# Altium PCB Tugas1.PcbDoc
Units mil, origin at the board's own origin, x right, y up, seen from the top; angles counter-clockwise.
Board outline 6000 x 4000 mil, 2 copper layers (Top Layer, Bottom Layer); 14 components, 13 nets, 57 pads, 0 vias.
Unrouted connection lines stored in the file: 1.
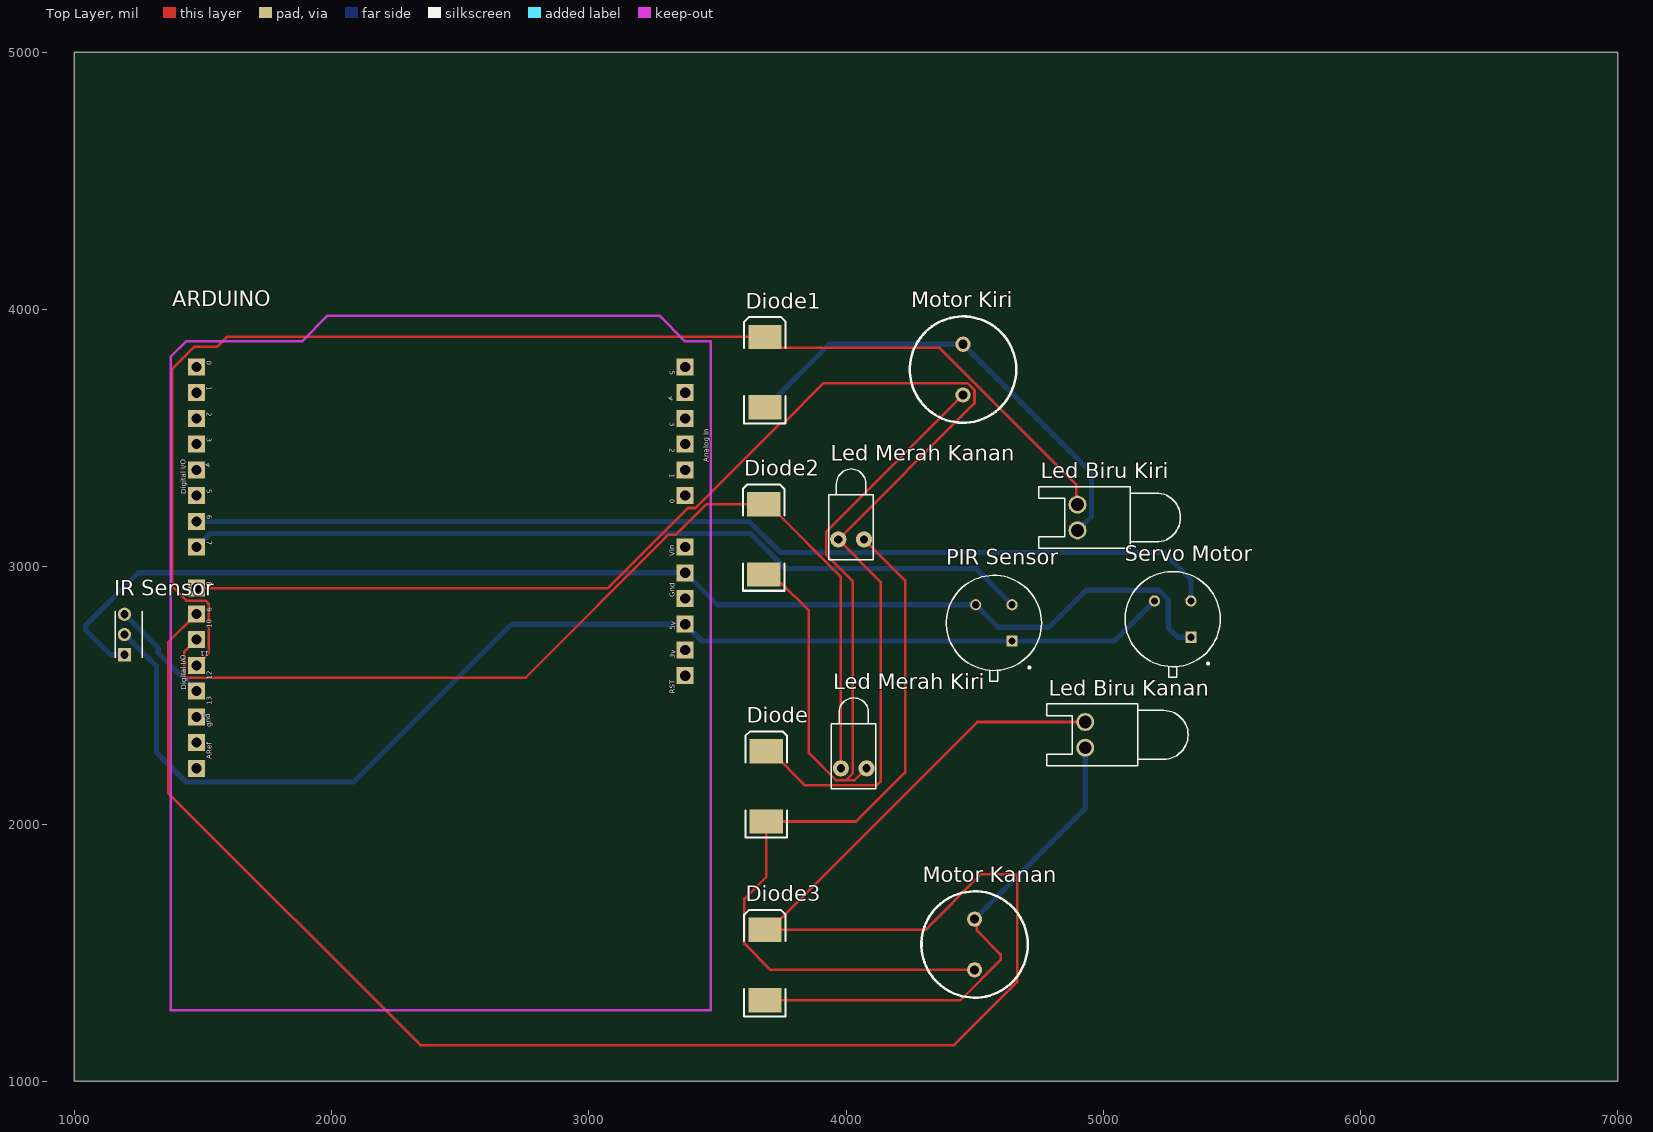
[diagram p0: Top Layer view]
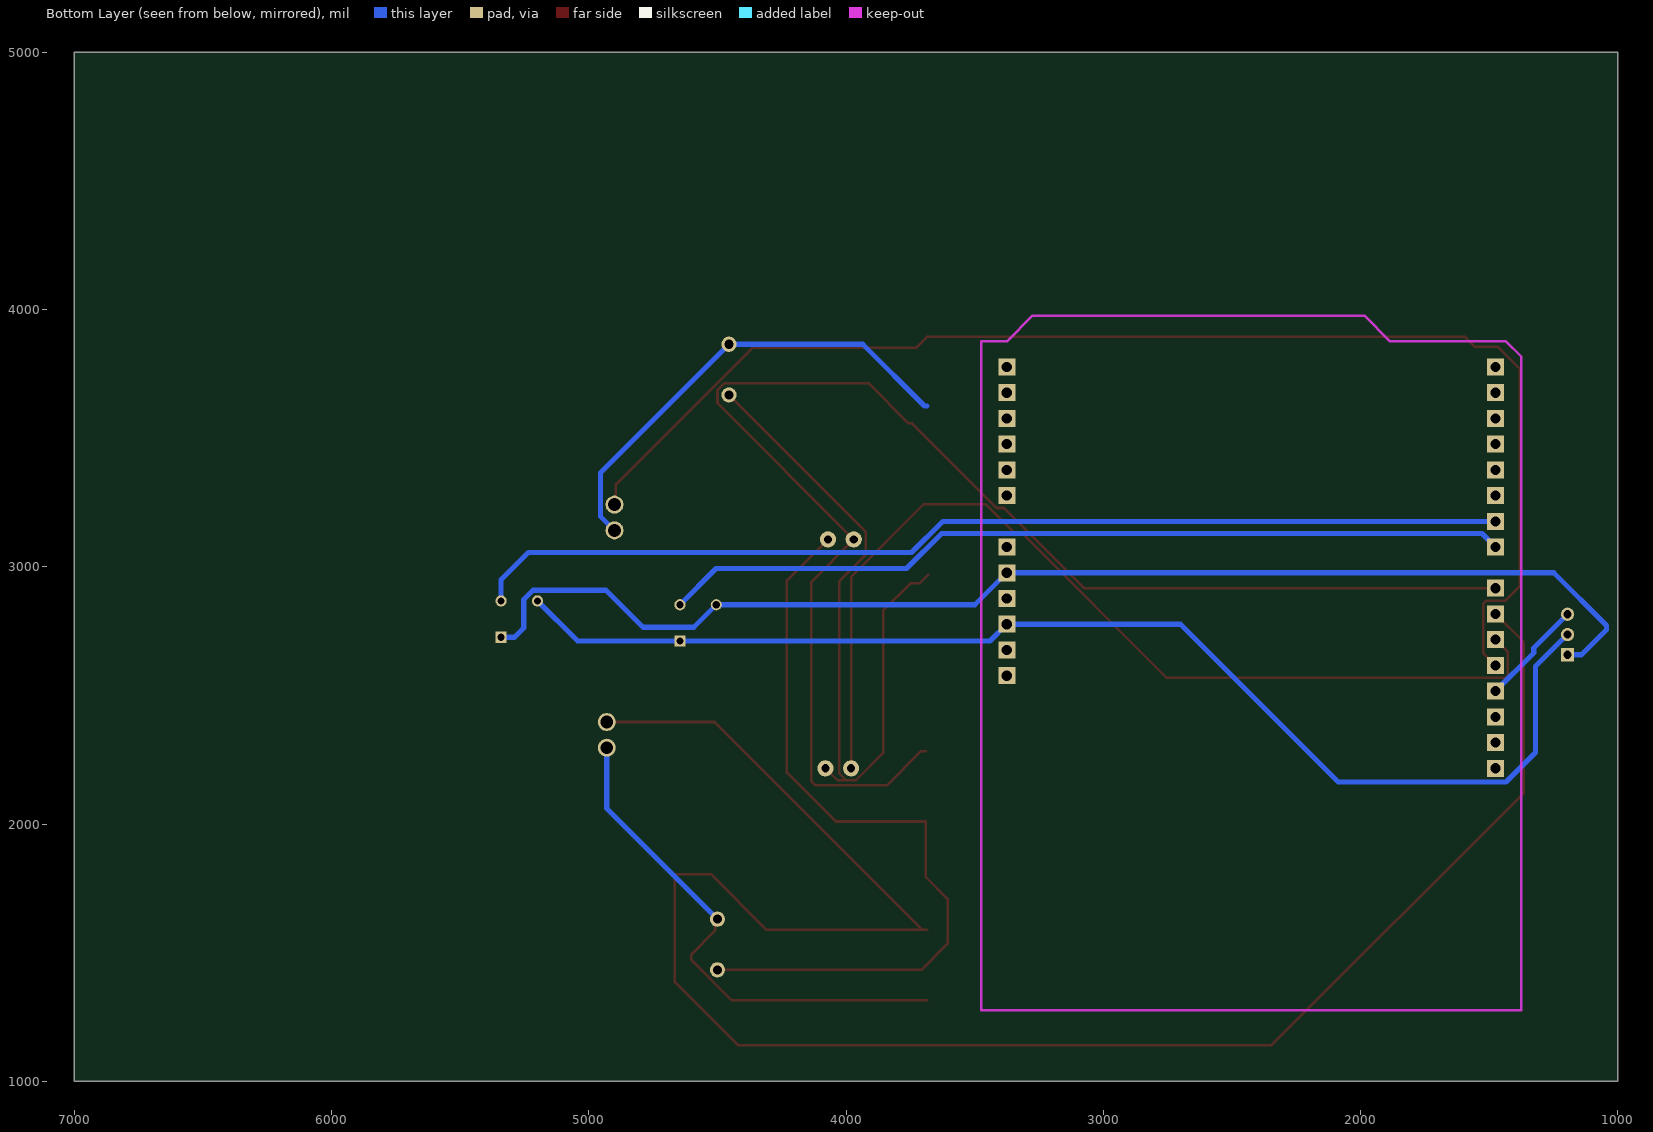
[diagram p1: Bottom Layer view, seen from below]

## Layer stack, top to bottom
Top Solder: solder mask 0.4, Solder Resist, Dk 3.5
Top Layer: signal copper 1.4
Dielectric 1: dielectric 12.6, FR-4, Dk 4.8
Bottom Layer: signal copper 1.4
Bottom Solder: solder mask 0.4, Solder Resist, Dk 3.5

## Board outline
1000,1000 7000,1000 7000,5000 1000,5000

## Design rules (kind name [scope] priority, off if disabled: settings)
Clearance [All] p1: gap=10 ignorepadtopadclearanceinfootprint=FALSE except(0: Arc-Hole Track-Hole SMDPad-Hole THPad-Hole Via-Hole Fill-Hole Poly-Hole Region-Hole Text-Hole)
PolygonConnect [All] p1: connectstyle=Relief reliefconductorwidth=10 reliefentries=4 polygonreliefangle="90 Angle" airgapwidth=10
RoomDefinition Tugas1 [InComponentClass('Tugas1')] p1: confinementstyle=ConfineIn formatcopy=TRUE lockcomponents=FALSE outline 1010,1006.57 5475,1006.57 5475,4086.57 1010,4086.57
RoutingVias [All] p1: holewidth=28 width=50 viastyle="Through Hole" minholewidth=28 minwidth=50 maxholewidth=28 maxwidth=50
SolderMaskExpansion [All] p1: expansion=4 istentingtop=FALSE
Width [All] p1: maxlimit=20 minlimit=10 preferedwidth=20 toplayer_maxwidth=10 toplayer_prefwidth=10 minimp=50.000000 maximp=50.000000 favimp=50.000000
30 further rules are at their usual default settings.

## Components (designator, comment, footprint, x,y, rotation, side; value= is the part's Value field where it differs from the comment)
ARDUINO "" ARDUINO 2425,2996.57 r90 top
Diode "" SMC 3690,2146.57 r90 top
Diode1 "" SMC 3685,3756.57 r90 top
Diode2 "" SMC 3680,3106.57 r90 top
Diode3 "" SMC 3685,1451.57 r90 top
"IR Sensor" "" XDCR_TSL260R-LF 1195,2736.57 r90 top
"Led Biru Kanan" "" LED-0 4930,2346.57 r90 top
"Led Biru Kiri" "" LED-0 4900,3191.57 r90 top
"Led Merah Kanan" "" LED-1 4020,3106.57 r90 top
"Led Merah Kiri" "" LED-1 4030,2216.57 r90 top
"Motor Kanan" "" RB5-10.5 4500,1531.57 r90 top
"Motor Kiri" "" RB5-10.5 4455,3766.57 r90 top
"PIR Sensor" "" TO254P940H490-3 4575,2781.57 r90 top
"Servo Motor" "" TO254P940H490-3 5270,2796.57 r90 top

## Footprints (in the part's own frame and the unit in brackets; to place one, negate y for a bottom-side part, rotate by r counter-clockwise, add the part's x,y. Pads: shape width x height; smd on the part's side, far side on the other; paste and mask are expansions set on the pad)
ARDUINO [mil]
  rect 66x66 hole 39.4: 3V(-320,-950) 5V(-220,-950) A0(280,-950) A1(380,-950) A2(480,-950) A3(580,-950) A4(680,-950) A5(780,-950) AREF(-780,950) D0(780,950) D1(680,950) D2(580,950) D3(480,950) D4(380,950) D5(280,950) D6(180,950) D7(80,950) D8(-80,950) D9(-180,950) D10(-280,950) D11(-380,950) D12(-480,950) D13(-580,950) GND(-680,950) GND1(-20,-950) GND2(-120,-950) RESET(-420,-950) VIN(80,-950)
  Keep-Out Layer lines w10: -1720,1050 820,1050 880,990 880,540 980,440 980,-850 880,-950 880,-1050 -1720,-1050 -1720,1050
LED-0 [mil] "LED; 2 Leads"
  round 70 hole 50: 1(50,0) 2(-50,0)
  silkscreen extent -120,-400 120,150
LED-1 [mm] "LED; 2 Leads"
  round 1.6 hole 0.8: 1(0,1.27) 2(0,-1.27)
  silkscreen extent -2,-2.2 6.95,2.2
RB5-10.5 [mm] "Capacitor (Radial); 2 Leads"
  round 1.5 hole 0.9: 1(-2.5,0) 2(2.5,0)
  silkscreen extent -5.25,-5.25 5.25,5.25
SMC [mm] "DO-214-AB/SMC; 2 C-Bend Leads; Body 7.9 x 5.9 mm, inc. leads (LxW)"
  rect 2.4x3.3 smd: 1(-3.475,0) 2(3.475,0)
  silkscreen extent -5.07,-2.05 5.43,2.05
TO254P940H490-3 [mm]
  rect 1.1x1.1 hole 0.7: 1(-1.796,-1.796)
  round 1.1 hole 0.7: 2(1.796,-1.796) 3(1.796,1.796)
  silkscreen extent -5.75,-4.7 4.7,4.7
XDCR_TSL260R-LF [mm]
  rect 1.308x1.308 hole 0.8: 1(-2,0)
  round 1.308 hole 0.8: 2(0,0) 3(2,0)
  silkscreen extent -2.3,-1.77 2.3,0.9

## Part data
ARDUINO: library part ARDUINOUNO, Contributor=Adafruit, spicePre=U, spiceSymbolName=ARDUINOUNO
Diode Diode1 Diode2 Diode3: library part Diode, "Default Diode", Code_JEDEC=DO-214-AB, LatestRevisionDate=17-Jul-2002, LatestRevisionNote="Re-released for DXP Platform.", PackageDescription="DO-214-AB/SMC; 2 C-Bend Leads; Body 7.9 x 5.9 mm, inc. leads (LxW)", PackageReference=SMC, PackageVersion=Sep-1996, Published=8-Jun-2000, Publisher="Altium Limited"
"IR Sensor": library part TSL260R-LF, "Optical Sensor IR 940nm Voltage Radial - 3 Leads", Package="Radial-3 ams", Availability=Unavailable, MF=ams, MP=TSL260R-LF, Price=None, SnapEDA_Link=https://www.snapeda.com/parts/TSL260R-LF/ams/view-part/231471/?ref=snap
"Led Biru Kanan" "Led Biru Kiri": library part LED0, "Typical INFRARED GaAs LED", LatestRevisionDate=08-Jul-2005, LatestRevisionNote="Mech Layer 1 removed.", PackageDescription="LED; 2 Leads", PackageReference=LED-0, Published=8-Jun-2000, Publisher="Altium Limited"
"Led Merah Kanan" "Led Merah Kiri": library part LED1, "Typical RED GaAs LED", LatestRevisionDate=08-Jul-2005, LatestRevisionNote="Mech Layer 1 removed.", PackageDescription="LED; 2 Leads", PackageReference=LED-1, Published=8-Jun-2000, Publisher="Altium Limited"
"Motor Kanan" "Motor Kiri": library part Motor, "Motor, General Kind", LatestRevisionDate=17-Jul-2002, LatestRevisionNote="Re-released for DXP Platform.", PackageDescription="Capacitor (Radial); 2 Leads", PackageReference=RB5-10.5, Published=24-Mar-1999, Publisher="Altium Limited"
"PIR Sensor" "Servo Motor": library part IRA-S210ST01, "Sensor PIR _Passive Infrared_ Radial, Metal Can, Lensed - 3 Lead", Package="Radial Murata", Availability=Unavailable, MF="Murata Electronics", MP=IRA-S210ST01, Price=None, SnapEDA_Link=https://www.snapeda.com/parts/IRA-S210ST01/Murata%20Electronics%20North%20America/view-part/625479/?ref=snap

## Nets (pads, with @x,y where several pads share a name; then routed paths per layer and width w, separated by ;. In a path a pad name is that pad's centre, name@x,y a point inside that pad or via, vN(x,y) a via of type N, cw(c..) or ccw(c..) an arc to the next point about the centre after c; other vN are vias at no path point)
NetARDUINO_5V: "IR Sensor.2" "PIR Sensor.1" "Servo Motor.3" ARDUINO.5V | length 4784
  Bottom Layer w20: 1195,2736.57 1196.04,2736.57 1319.76,2612.85 1319.76,2277.53 1433.72,2163.58 2086.36,2163.58 2699.36,2776.57 ARDUINO.5V 3440.71,2710.86 4645.71,2710.86 5042.87,2710.86 5199.29,2867.29
NetARDUINO_D6: "Servo Motor.2" ARDUINO.D6 | length 4041.9
  Bottom Layer w20: ARDUINO.D6 3623.43,3176.57 3744.92,3055.08 5234.92,3055.08 5340.71,2949.29 5340.71,2867.29
NetARDUINO_D7: "PIR Sensor.2" ARDUINO.D7 | length 3307.5
  Bottom Layer w20: ARDUINO.D7 1528,3129.57 3628,3129.57 3764.41,2993.16 4504.84,2993.16 4645.71,2852.29
NetARDUINO_D8: "Led Merah Kanan.1" ARDUINO.D8 Diode.2 | length 5680.3
  Top Layer w10: ARDUINO.D8 3073.93,2916.57 3385.93,3228.57 3414.21,3228.57 3743.16,3557.52 3756.17,3557.52 3911.33,3712.68 4473.44,3712.68 4499.53,3686.59 4499.53,3636.1 3970,3106.57 4135,2941.57 4135,2165.86 4119.14,2150 3841.1,2150 3707.72,2283.39 Diode.2
NetARDUINO_D9: "Led Biru Kanan.1" ARDUINO.D9 Diode3.2 | length 7597.9
  Top Layer w10: ARDUINO.D9 1365,2706.57 1365,2120 2345,1140 4420,1140 4665,1385 4665,1799.14 4659.14,1805 4525,1805 4308.39,1588.39 Diode3.2@3702.72,1588.39 ; Diode3.2 Diode3.2@3702.72,1588.39 ; 4930,2396.57 4510.91,2396.57 Diode3.2@3702.72,1588.39
NetARDUINO_D10: "Led Merah Kiri.1" ARDUINO.D10 Diode2.2 | length 3856.7
  Top Layer w10: ARDUINO.D10 1427,2668.57 1427,2577.36 1435.79,2568.57 2754.21,2568.57 3310.21,3124.57 3338.5,3124.57 3457.31,3243.39 3697.72,3243.39 3980,2961.1 3980,2216.57
NetARDUINO_D11: "Led Biru Kiri.1" ARDUINO.D11 Diode1.2 | length 5159.2
  Top Layer w10: ARDUINO.D11 1523,2664.57 1523,2855.79 1510.21,2868.57 1435.79,2868.57 1380,2924.36 1380,3768.79 1466.21,3855 1555,3855 1593.39,3893.39 Diode1.2 3727.24,3851.14 4363.26,3851.14 4894.55,3319.86 4894.55,3247.03 4900,3241.57
NetARDUINO_D12: "IR Sensor.3" ARDUINO.D12 | length 414.7
  Bottom Layer w20: 1195,2815.32 1326.51,2683.8 1326.51,2665.06 ARDUINO.D12
NetARDUINO_GND1: "IR Sensor.1" "PIR Sensor.3" "Servo Motor.1" ARDUINO.GND1 | length 4878.7
  Bottom Layer w20: 1195,2657.83 1140.49,2657.83 1043.28,2755.05 1043.28,2771.61 1248.25,2976.57 ARDUINO.GND1 3499.29,2852.29 4504.29,2852.29 4591.57,2765 4789.61,2765 4933.55,2908.94 5216.54,2908.94 5252.8,2872.68 5252.8,2762.12 5289.06,2725.86 5340.71,2725.86
NetDiode1_1: "Led Biru Kiri.2" "Motor Kiri.2" Diode1.1 | length 1822.7
  Bottom Layer w20: 3685,3625 3695,3625 3935,3865 4455,3865 4955,3365 4955,3196.57 4900,3141.57
NetDiode2_1: "Led Merah Kiri.2" "Motor Kiri.1" Diode2.1 | length 2847.7
  Top Layer w10: Diode2.1 3713.96,2935.8 3749.96,2935.8 3855.35,2830.41 3855.35,2275.47 3960.74,2170.08 3999.26,2170.08 ; 4080,2216.57 4033.5,2170.08 3999.26,2170.08 ; 4455,3668.15 3923.5,3136.65 3923.5,3045.88 4026.5,2942.89 4026.5,2197.32 3999.26,2170.08
NetDiode3_1: "Led Biru Kanan.2" "Motor Kanan.2" Diode3.1 | length 2026.4
  Top Layer w10: Diode3.1 4444.59,1314.76 4601.33,1471.5 4601.33,1492.89 4508.75,1585.47 4508.75,1621.25 4500,1630
  Bottom Layer w20: 4500,1630 4930,2060 4930,2296.57
NetDiode_1: "Led Merah Kanan.2" "Motor Kanan.1" Diode.1 | length 3038.8
  Top Layer w10: 4070,3106.57 4230,2946.57 4230,2200 4039.76,2009.76 Diode.1 3690,1793.7 3605.04,1708.74 3605.04,1534.93 3706.82,1433.15 4500,1433.15
pads on no net: ARDUINO.3V ARDUINO.A0 ARDUINO.A1 ARDUINO.A2 ARDUINO.A3 ARDUINO.A4 ARDUINO.A5 ARDUINO.AREF ARDUINO.D0 ARDUINO.D1 ARDUINO.D2 ARDUINO.D3 ARDUINO.D4 ARDUINO.D5 ARDUINO.D13 ARDUINO.GND ARDUINO.GND2 ARDUINO.RESET ARDUINO.VIN

## Text inside footprints (layer, text, board x,y; h text height)
ARDUINO: Top Overlay "RST" at 3335,2506.57 h20 r90; Top Overlay "3v" at 3334.93,2643.36 h20 r83; Top Overlay "5v" at 3334.93,2753.36 h20 r83; Top Overlay "Gnd" at 3335,2881.57 h20 r90; Top Overlay "Vin" at 3334.99,3039.92 h20 r92; Top Overlay "Analog In" at 3467,3406.57 h20 r90; Top Overlay "0" at 3315,3261.57 h20 r270; Top Overlay "1" at 3315,3361.57 h20 r270; Top Overlay "2" at 3315,3461.57 h20 r270; Top Overlay "3" at 3315,3561.57 h20 r270; Top Overlay "4" at 3316.91,3667.45 h20 r234; Top Overlay "5" at 3315,3761.57 h20 r270; Top Overlay "ARef" at 1535,2251.57 h20 r90; Top Overlay "gnd" at 1534.88,2378.14 h20 r99; Top Overlay "13" at 1535,2461.57 h20 r90; Top Overlay "12" at 1535,2561.57 h20 r90; Top Overlay "11" at 1525,2671.57 h20 r180; Top Overlay "10" at 1535,2761.57 h20 r90; Top Overlay "9" at 1515.04,2840.7 h20 r275; Top Overlay "8" at 1515,2941.57 h20 r270; Top Overlay "7" at 1515,3101.57 h20 r270; Top Overlay "6" at 1515.04,3200.7 h20 r275; Top Overlay "5" at 1515,3301.57 h20 r270; Top Overlay "4" at 1516.81,3407.31 h20 r235; Top Overlay "3" at 1515,3501.57 h20 r270; Top Overlay "2" at 1515,3601.57 h20 r270; Top Overlay "1" at 1515,3701.57 h20 r270; Top Overlay "0" at 1515,3801.57 h20 r270; Top Overlay "Digital I/O" at 1435,2521.75 h20 r91; Top Overlay "Digital I/O" at 1435,3281.75 h20 r91